# Altium PCB radxa_cm3_io_board_v1360_pcb_layout.PcbDoc (part 2 of 7)
Units mil, origin at the board's own origin, x right, y up, seen from the top; angles counter-clockwise.
Board outline 6299.61 x 3544.09 mil, 4 copper layers (Top, GND, Power, Bottom), stack 35.4 mil thick; 513 components, 397 nets, 1855 pads, 2695 vias.
Unrouted connection lines stored in the file: 280.
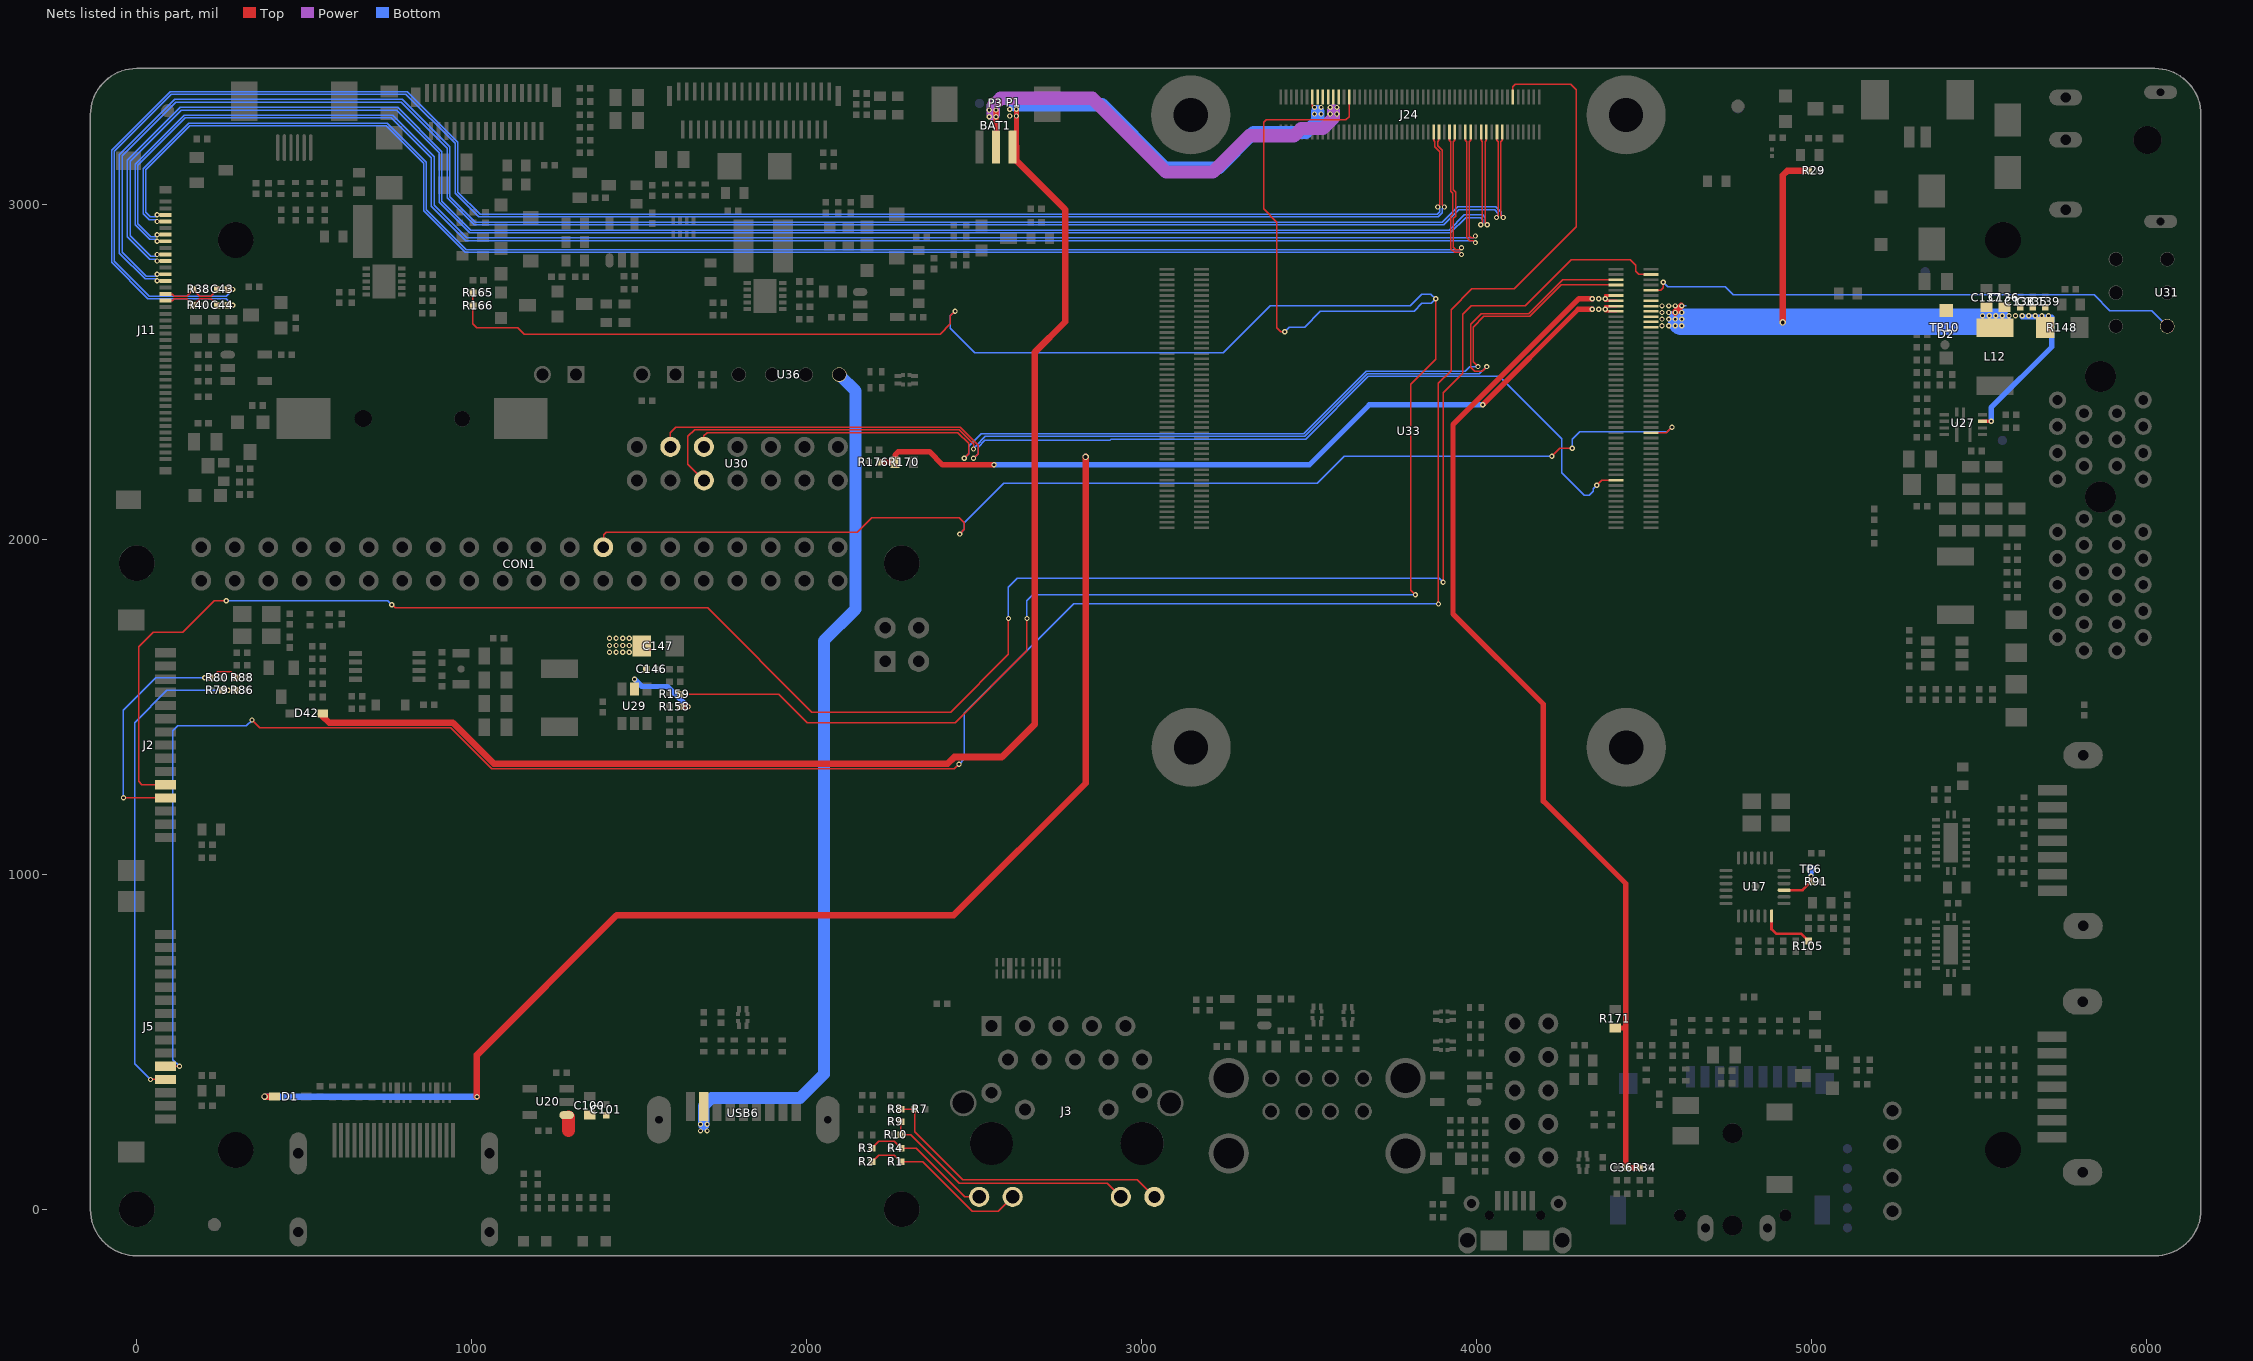
[diagram p4: the nets of this part, all layers, seen from the top]

## Footprints (in the part's own frame and the unit in brackets; to place one, negate y for a bottom-side part, rotate by r counter-clockwise, add the part's x,y. Pads: shape width x height; smd on the part's side, far side on the other; paste and mask are expansions set on the pad) (continued)
QFN24 [mm]
  oval 0.25x1 smd: 1(-1.25,-2.2) 2(-0.75,-2.2) 3(-0.25,-2.2) 4(0.25,-2.2) 5(0.75,-2.2) 6(1.25,-2.2) 13(1.25,2.2) 14(0.75,2.2) 15(0.25,2.2) 16(-0.25,2.2) 17(-0.75,2.2) 18(-1.25,2.2)
  oval 1x0.25 smd: 7(2.2,-1.25) 8(2.2,-0.75) 9(2.2,-0.25) 10(2.2,0.25) 11(2.2,0.75) 12(2.2,1.25) 19(-2.2,1.25) 20(-2.2,0.75) 21(-2.2,0.25) 22(-2.2,-0.25) 23(-2.2,-0.75) 24(-2.2,-1.25)
  rrect100% 0.6x0.6 smd: 25(-0.037,-0.041)
  Top region: -1.253,0.95 -1.242,1.028 -1.212,1.101 -1.164,1.164 -1.101,1.212 -1.028,1.242 -0.95,1.253 -0.95,1.25 0.95,1.253 1.028,1.242 1.101,1.212 1.164,1.164 1.212,1.101 1.242,1.028 1.253,0.95 1.25,0.95 1.253,-0.95 1.242,-1.028 1.212,-1.101 1.164,-1.164 1.101,-1.212 1.028,-1.242 0.95,-1.253 0.95,-1.25 -0.95,-1.253 -1.028,-1.242 -1.101,-1.212 -1.164,-1.164 -1.212,-1.101 -1.242,-1.028 -1.253,-0.95 -1.25,-0.95 -1.25,0.95
  silkscreen extent -2.03,-2.98 2.01,2
R0201 [mm]
  rect 0.3x0.3 smd: 1(-0.25,0) 2(0.25,0)
  silkscreen extent -0.5,-0.25 0.5,0.25
R0402 [mm]
  rect 0.5x0.5 smd: 1(-0.4,0) 2(0.4,0)
  silkscreen extent -0.8,-0.4 0.8,0.4
R0603 [mm]
  rect 0.7x0.9 smd: 1(-0.7,0) 2(0.7,0)
  silkscreen extent -1.2,-0.6 1.2,0.6
R0805 [mm]
  rect 0.9x1.3 smd: 1(-0.85,0) 2(0.85,0)
  silkscreen extent -1.5,-0.8 1.5,0.8
R1206 [mm]
  rect 1.4x1.6 smd mask+0.05: 1(-1.3,0) 2(1.3,0)
  silkscreen extent -2.2,-1 2.2,1
RJ45_HRK1 [mm]
  rect 1.524x1.524 hole 0.9 mask+0.05: 1(0,0)
  round 1.524 / inner round 1.1 / far side round 1.524 hole 0.9 mask+0.05: 2(1.27,-2.54) 3(2.54,0) 4(3.81,-2.54) 5(5.08,0) 6(6.35,-2.54) 7(7.62,0) 8(8.89,-2.54) 9(10.16,0) 10(11.43,-2.54) 11(0,-5.06) 12(2.54,-6.33) 13(8.89,-6.33) 14(11.43,-5.06) 18(12.36,-12.95)
  round 1.524 hole 1.02 mask+0.05: 15(-0.92,-12.95) 16(1.62,-12.95) 17(9.82,-12.95)
  round 2 / inner round 2.2 / far side round 2.2 hole 1.6 mask+0.15: 19(-2.13,-5.84) 20(13.57,-5.84)
  round 3.25 hole 3.25: 21(0.005,-8.89) 22(11.435,-8.89)
  silkscreen extent -2.33,-19.64 13.77,1.71
RN8P4RC [mil]
  rect 11x21 smd: 1(30,-20.5) 2(10,-20.5) 3(-10,-20.5) 4(-30,-20.5) 5(-30,20.5) 6(-10,20.5) 7(10,20.5) 8(30,20.5)
  silkscreen extent -44,-54 44,21
RP2_0405 [mm]
  rect 0.5x0.3 smd: 1(-0.625,-0.275) 2(0.625,-0.275) 3(-0.625,0.275) 4(0.625,0.275)
  silkscreen extent -1,-0.6 1.03,0.6
S0T-23 [mil]
  rect 36x36 smd: 1(-37.5,-39) 2(37.5,-39)
  rect 36x50 smd: 3(0,41)
  silkscreen extent -55,-50 55,40
SMD-3P-1.25 [mm]
  rect 0.6x2.5 smd: 1(-1.25,0) 2(0,0) 3(1.25,0)
  rect 2x2.7 smd: 4(3.9,-3.25) 5(-3.9,-3.25)
  silkscreen extent -4.41,-5.51 4.4,-0.48
SMD_1D25X2PIN_90 [mm]
  rect 0.8x1.6 smd: 1(-1.25,0) 2(0,0)
  rect 2.1x3 smd: 3(-3.85,2.82) 4(2.6,2.82)
  silkscreen extent -5,-0.9 3.72,4.47
SMD_SATA_7P_50_180 [mm]
  rect 0.8x2.2 smd: 1(0,0) 2(1.27,0) 3(2.54,0) 4(3.81,0) 5(5.08,0) 6(6.35,0) 7(7.62,0)
  oval 2x3 hole 0.8 slot 1.7 at 90 deg: 8(10.28,2.3) 9(-2.66,2.3)
  silkscreen extent -4.19,-0.57 11.81,11.16
SOD323 [mm]
  rect 0.63x0.83 smd: 1(-1.115,0) 2(1.115,0)
  silkscreen extent -1.6,-0.7 1.84,0.7
SOD_123 [mm]
  rect 1x1 smd: 1(-1.8,0) 2(1.8,0)
  silkscreen extent -1.11,-0.9 1.13,0.9
SOD_323 [mm]
  rect 0.8x0.6 smd mask+0.05: 1(-1.2,0) 2(1.2,0)
  silkscreen extent -0.67,-0.65 0.64,0.65
SON10_2R50X1R00X0R50 [mm]
  rect 0.2x0.675 smd: 1(-1,-0.437) 2(-0.5,-0.437) 4(0.5,-0.437) 5(1,-0.437) 6(1,0.437) 7(0.5,0.437) 9(-0.5,0.437) 10(-1,0.437)
  rect 0.4x0.775 smd: 3(0,-0.388) 8(0,0.388)
  silkscreen extent -1.46,-1.39 1.25,0.5
SOT23 [mil]
  rect 39x39 smd: 1(-38,-44.53) 2(38,-44.53)
  rect 39.37x47.24 smd: 3(0,44.53)
  silkscreen extent -59,-19 59,23
SOT25 [mm]
  oval 0.6x1.1 smd: 1(-0.95,-1.4)
  rect 0.6x1.1 smd: 2(0,-1.4) 3(0.95,-1.4) 4(0.95,1.4) 5(-0.95,1.4)
  silkscreen extent -1.5,-0.52 1.5,0.55
SOT_23 [mm]
  rect 0.8x1.1 smd: 1(-0.95,-1.1) 2(0.95,-1.1) 3(0,1.1)
  silkscreen extent -1.6,-0.9 1.6,0.9
SOT_23_5 [mm]
  oval 1.1x0.6 smd: 1(-1.4,1)
  rect 1.1x0.6 smd: 2(-1.4,0) 3(-1.4,-1) 4(1.4,-1) 5(1.4,1)
  silkscreen extent -0.52,-1.5 0.55,1.5
SOT_23_6 [mm]
  rect 0.7x1 smd mask+0.05: 1(-0.95,-1.3) 2(0,-1.3) 3(0.95,-1.3) 4(0.95,1.3) 5(0,1.3) 6(-0.95,1.3)
  silkscreen extent -1.82,-1.72 1.75,0.7
TF-CKT01-009D [mm]
  rect 1.6x0.7 smd: 1(-10.516,3.2) 2(-10.516,2.1) 3(-10.516,1) 4(-10.516,-0.1) 5(-10.516,-1.2) 6(-10.516,-2.3) 7(-10.516,-3.4) 8(-10.516,-4.5) 9(-10.516,-5.6)
  rect 1.6x1.4 smd: 10(-10.016,-7) 13(-10.016,7.9)
  rect 2.2x1.2 smd: 11(-0.416,-6.8) 12(-0.416,8.7)
  round 0.9 hole 0.9 unplated: 14(0,4) 15(0,-4)
  silkscreen extent -10.52,-6.4 3.98,8.3
TP_0R70 [mm]
  round 0.7 smd: 1(0,0)
  silkscreen extent -0.45,-0.45 0.45,0.45
USB30-L1 [mm]
  rect 0.7x2.2 smd: 1(-3,0) 2(-1,0) 3(1,0) 4(3,0) 5(4,0) 6(2,0) 7(0,0) 8(-2,0) 9(-4,0)
  oval 1.8x3.6 / inner oval 0.7x2.6 / far side oval 1.8x3.6 hole 0.584 slot 2.489 at 90 deg: 10(-6.4,-1) 11(6.4,-1)
  silkscreen extent -9.28,-14.64 9.29,0.92
USB_DUAL [mm]
  round 1.3 / inner round 0.9 / far side round 1.3 hole 0.9: 1(3.18,3.5) 2(3.18,1) 3(3.18,-1) 4(3.18,-3.5) 5(5.68,3.5) 6(5.68,1) 7(5.68,-1) 8(5.68,-3.5)
  round 3.048 / inner round 2.5 / far side round 3.048 hole 2.3: 9(0,6.7)
  round 3.048 / inner round 2.5 / far side round 3.048 hole 2.286: 10(0,-6.7) 11(5.7,6.7) 12(5.7,-6.7)
  silkscreen extent -9.97,-7.52 7.1,7.61
XIAO_4PIN_2D54 [mm]
  round 1.4 hole 0.9: 1(0.01,0) 2(2.55,0) 3(5.09,0) 4(7.63,0)
  silkscreen extent -1.19,-3.3 8.81,2.36

## Via types
v1: diameter 15.75, hole 7.87, Top to Bottom, 2660 vias
v2: diameter 19.68, hole 11.81, Top to Bottom, 35 vias

## Nets (pads, with @x,y where several pads share a name; then routed paths per layer and width w, separated by ;. In a path a pad name is that pad's centre, name@x,y a point inside that pad or via, vN(x,y) a via of type N, cw(c..) or ccw(c..) an arc to the next point about the centre after c; other vN are vias at no path point)
3V3_PWR_EN: J24.74 R159.1 R165.2 R166.1 | length 8067.4
  Top w3.94: R165.2@1003.94,2736.22 R166.1@1003.94,2696.85 1003.94,2643.7 1015.75,2631.89 1137.8,2631.89 1157.48,2612.2 2398.31,2612.2 2429.13,2643.03 2429.13,2667.32 v1(2442.91,2681.1) ; R159.1@1622.05,1537.4 1917.32,1537.4 2001.97,1452.76 2442.91,1452.76 2657.48,1667.32 v1(2657.48,1763.78) ; v1(3427.17,2620.08) 3415.35,2620.08 3403.54,2631.89 3403.54,2946.85 3364.17,2986.22 3364.17,3244.68 3371.46,3251.97 3609.65,3251.97 3619.49,3261.81 J24.74@3619.49,3320.08 ; v1(3816.93,1834.65) 3803.15,1848.43 3803.15,2462.6 3877.95,2537.4 v1(3877.95,2718.5)
  Bottom w3.94: v1(2442.91,2681.1) 2429.13,2667.32 2429.13,2629.92 2501.97,2557.09 3244.09,2557.09 3383.86,2696.85 3801.18,2696.85 3836.61,2732.28 3863.35,2732.28 v1@3877.54,2718.09 ; v1(2657.48,1763.78) 2657.48,1816.99 2675.14,1834.65 v1(3816.93,1834.65) ; v1(3427.17,2620.08) 3440.94,2633.86 3486.22,2633.86 3533.46,2681.1 3812.99,2681.1 3836.61,2704.72 3864.17,2704.72 v1@3877.54,2718.09 ; v1(3877.95,2718.5) v1@3877.54,2718.09
4G_DISABLE: CON1.26 U33.37 | length 3537
  Top w3.94: CON1.26@1392.91,1976.38 1393.7,1976.38 1393.7,2013.78 1401.57,2021.65 2151.57,2021.65 2194.88,2064.96 2454.72,2064.96 2470.47,2049.21 2470.47,2029.53 v1(2456.69,2015.75) ; v1(4224.41,2248.03) 4248.03,2271.65 v1(4285.43,2271.65) ; U33.37@4520.47,2318.31 4566.34,2318.31 v1(4582.68,2334.65)
  Bottom w3.94: v1(2456.69,2015.75) 2470.47,2029.53 2470.47,2049.89 2587.91,2167.32 3523.62,2167.32 3604.33,2248.03 v1(4224.41,2248.03) ; v1(4285.43,2271.65) 4285.43,2299.21 4307.09,2320.87 4568.9,2320.87 v1(4582.68,2334.65)
5V0_USB30: C100.1 C101.1 U20.1 U36.1 USB6.1 | length 2649.1
  Top w39.37: 1289.37,236.22 U20.1@1289.37,275.59
  Bottom w3.94: v1(1683.07,253.94) 1692.91,253.94
  Bottom w35.43: 1692.91,253.94 1692.91,309.06 1716.54,332.68 1980.31,332.68 2051.18,403.54 2051.18,1696.85 2145.67,1791.34 2145.67,2443.31 U36.1@2097.24,2491.73
  other v1: 1683.07,234.25 1702.76,234.25 1702.76,253.94
100M_LED_G+: J3.15 R3.2 R4.1 | length 396.7
  Top w3.94: R3.2@2194.88,183.07 2214.57,202.76 2261.81,202.76 R4.1@2281.5,183.07 2326.77,183.07 2472.44,37.4 J3.15@2514.96,37.4
100M_LED_G-: J3.16 R1.2 R2.1 | length 515.5
  Top w3.94: R2.1@2194.88,141.73 2214.57,161.42 2261.81,161.42 R1.2@2281.5,141.73 2346.46,141.73 2494.09,-5.91 2571.65,-5.91 J3.16@2614.96,37.4
1000M_LED_Y+: J3.17 R9.2 R10.1 | length 772.3
  Top w3.94: R9.2@2281.5,261.81 R10.1@2281.5,222.44 2311.02,222.44 2454.72,78.74 2896.46,78.74 J3.17@2937.8,37.4
1000M_LED_Y-: J3.18 R7.2 R8.1 | length 904
  Top w3.94: R8.1@2281.5,299.21 R7.2@2322.83,299.21 2323.23,298.82 2323.23,231.89 2466.54,88.58 2986.61,88.58 J3.18@3037.8,37.4
+1V8: C36.1 R34.2 R171.2 U33.88 U33.90 | length 3159.5
  Top w3.94: 4438.98,596.46 4444.22,596.46 4444.88,597.11
  Top w7.87: U33.88@4415.75,2712.01 4383.86,2712.01 v1(4383.86,2718.5) 4383.86,2727.76 U33.90@4415.75,2727.76
  Top w15.75: v1(4344.49,2718.5) 4305.12,2718.5 3929.13,2342.52 3929.13,1777.56 4198.82,1507.87 4198.82,1218.5 4444.88,972.44 4444.88,597.11 4444.88,541.34 ; R171.2@4413.39,541.34 4444.88,541.34 ; R34.2@4486.22,124.02 C36.1@4448.82,124.02 4444.88,127.95 4444.88,541.34
  other v1: 4364.17,2718.5
+3V3: R170.2 R176.2 U33.84 U33.86 | length 2441.9
  Top w7.87: U33.84@4415.75,2680.51 4383.86,2680.51 v1(4383.86,2687.01) 4383.86,2696.26 U33.86@4415.75,2696.26
  Top w15.75: R176.2@2216.54,2230.31 R170.2@2263.78,2230.31 2263.78,2251.97 2273.62,2261.81 2366.14,2261.81 2405.51,2222.44 v1(2559.06,2222.44) ; v1(4017.72,2401.57) 4303.15,2687.01 v1(4344.49,2687.01)
  Bottom w15.75: v1(2559.06,2222.44) 3500,2222.44 3679.13,2401.57 v1(4017.72,2401.57)
  other v1: 4364.17,2687.01
+5V_INPUT: C135.1 C136.1 C137.1 C138.1 C139.1 C146.1 C147.1 D1.1 D2.2 L12.2 R29.1 R148.2 R158.1 TP10.1 U27.5 U29.5 U33.77 U33.79 U33.81 U33.83 U33.85 U33.87 | length 7138.1
  Top w3.94: L12.2@5547.24,2631.89 5549.21,2631.89 v1(5549.21,2667.32)
  Top w9.84: U27.5@5509.85,2352.36 5527.56,2352.36 v1(5535.43,2352.36)
  Top w15.75: R158.1@1622.05,1500 v1(1645.67,1500)
  Top w19.68: v2(381.89,336.61) D1.1@411.42,336.61 ; v1(1015.75,336.61) 1015.75,460.99 1432.71,877.95 2438.42,877.95 2832.68,1272.21 v2(2832.68,2246.06) ; v1(4592.52,2677.17) 4595.47,2680.12 4595.47,2682.09 v1@4610.24,2696.85 ; v2(4913.39,2647.64) 4913.39,3086.61 4927.17,3100.39 R29.1@4990.16,3100.39
  Bottom w3.94: v1(4592.52,2696.85) 4625.98,2696.85 ; TP10.1@5397.64,2631.89 5399.61,2633.86 5399.61,2649.61 ; 5557.09,2649.61 v1(5568.9,2667.32)
  Bottom w7.87: v1(4572.83,2677.17) 4582.68,2677.17 4610.24,2649.61
  Bottom w15.75: v1(1486.22,1582.68) 1507.87,1561.02 1584.65,1561.02 v1(1645.67,1500) ; v1(5535.43,2352.36) 5535.43,2393.7 5716.54,2574.8 5716.54,2663.39 ; v1(5627.95,2667.32) 5627.95,2663.39 5716.54,2663.39 ; 5716.54,2612.2 5716.54,2663.39
  Bottom w19.68: v2(381.89,336.61) v1(1015.75,336.61) ; v2(4913.39,2647.64) 4917.32,2647.64 v2@4919.29,2649.61
  Bottom w78.74: 5557.09,2649.61 5399.61,2649.61 ; 5399.61,2649.61 4919.29,2649.61 4610.24,2649.61 5399.61,2649.61
  other v1: 1411.42,1663.39 1431.1,1663.39 1450.79,1663.39 1470.47,1663.39 1411.42,1683.07 1431.1,1683.07 1450.79,1683.07 1470.47,1683.07 1411.42,1704.72 1431.1,1704.72 1450.79,1704.72 1470.47,1704.72 4553.15,2637.8 4572.83,2637.8 4592.52,2637.8 4612.2,2637.8 4553.15,2657.48 4572.83,2657.48 4592.52,2657.48 4612.2,2657.48 5509.84,2667.32 5529.53,2667.32 5588.58,2667.32 5608.27,2667.32 5647.64,2667.32 5667.32,2667.32 5687.01,2667.32 5706.69,2667.32 4553.15,2677.17 4612.2,2677.17 4553.15,2696.85 4572.83,2696.85 4612.2,2696.85
AIN0: U30.5 U33.96 | length 3353.7
  Top w3.94: U30.5@1693.31,2175.98 1645.67,2223.62 1645.67,2307.09 1665.35,2326.77 2454.78,2326.77 2498.03,2283.52 v1(2498.03,2269.68) ; v1(4029.53,2515.75) 4015.75,2501.97 3994.09,2501.97 3982.28,2513.78 3982.28,2641.73 4013.78,2673.23 4154.89,2673.23 4256.67,2775 U33.96@4415.75,2775
  Bottom w3.94: v1(2498.03,2269.68) 2496.98,2270.74 2503.94,2277.7 2503.94,2278.65 2532.37,2307.09 3486.32,2307.09 3673.33,2494.09 4007.87,2494.09 v1(4029.53,2515.75)
AIN1: U30.6 U33.94 | length 3152.2
  Top w3.94: U30.6@1693.31,2275.98 1693.31,2309.06 1703.15,2318.9 2451.52,2318.9 2484.25,2286.17 2484.25,2255.91 v1(2470.47,2242.13) ; v1(4003.94,2515.75) 3990.16,2529.53 3990.16,2531.5 3990.16,2633.86 4021.65,2665.35 4158.16,2665.35 4252.05,2759.25 U33.94@4415.75,2759.25
  Bottom w3.94: v1(2470.47,2242.13) 2484.25,2255.91 2484.25,2277.56 2521.65,2314.96 3483.02,2314.96 3670.02,2501.97 3965.45,2501.97 3979.23,2515.75 v1(4003.94,2515.75)
BAT_3V7_LOSE: BAT1.2 J24.78 J24.80 J24.82 P3.1 | length 1392.7
  Top w3.94: J24.80@3572.24,3320.08 J24.80@3572.83,3319.49
  Top w15.75: BAT1.2@2564.96,3171.26 v1(2564.96,3281.5)
  Power w3.94: v1(3562.99,3289.37) 3572.83,3279.53
  Power w7.87: v1(2545.28,3261.81) 2547.24,3261.81 2549.21,3259.84 2557.09,3267.72
  Power w39.37: 2557.09,3267.72 2557.09,3295.28 2578.74,3316.93 2852.36,3316.93 3072.83,3096.46 3212.6,3096.46 3320.87,3204.72 3454.72,3204.72 3476.38,3226.38 3541.34,3226.38 3572.83,3257.87 3572.83,3279.53
  Bottom w15.75: v1(2564.96,3281.5) P3.1@2564.96,3301.18
  other v1: 2564.96,3261.81 3562.99,3269.68 3582.68,3269.68 2545.28,3281.5 3582.68,3289.37
BAT_3V7_PLUS: BAT1.1 D42.1 J24.84 J24.86 J24.88 P1.1 | length 5314
  Top w3.94: J24.88@3509.25,3320.08 3509.25,3289.37 v1(3515.75,3289.37)
  Top w15.75: 2625.98,3173.23 v1(2625.98,3283.46)
  Top w19.68: D42.1@555.12,1480.31 555.12,1472.44 574.8,1452.76 943.95,1452.76 1066,1330.71 2421.26,1330.71 2440.94,1350.39 2582.68,1350.39 2681.1,1448.82 2681.1,2559.06 2771.65,2649.61 2771.65,2984.25 2625.98,3129.92 2625.98,3173.23
  Bottom w7.87: P1.1@2620.08,3297.24 2620.08,3283.46 v1(2625.98,3283.46) ; v1(3515.75,3269.68) 3517.72,3269.68 3525.59,3277.56
  Bottom w39.37: P1.1@2620.08,3297.24 2881.89,3297.24 3070.87,3108.27 3228.35,3108.27 3334.65,3214.57 3490.16,3214.57 3525.59,3250 3525.59,3277.56
  other v1: 2606.3,3263.78 2625.98,3263.78 3535.43,3269.68 2606.3,3283.46 3535.43,3289.37
BT_NDIS: U31.3 U33.91 | length 1614.6
  Top w3.94: U33.91@4520.47,2743.5 4549.21,2743.5 4557.09,2751.38 v1(4557.09,2767.72)
  Bottom w3.94: v1(4557.09,2767.72) 4570.87,2753.94 4741.51,2753.94 4765.13,2730.31 5842.52,2730.31 5889.76,2683.07 6014.17,2683.07 U31.3@6061.02,2636.22
BUSJ: R105.2 U17.18 | length 164.3
  Top w7.87: U17.18@4879.92,875.98 4879.92,836.61 4893.7,822.83 4968.5,822.83 R105.2@4990.16,801.18
CAM_CLKOUT0: J2.4 R80.1 R88.2 | length 781
  Top w3.94: v1(-39.37,1228.35) J2.4@86.61,1228.35 ; v1(202.76,1586.61) R80.1@224.41,1586.61 242.13,1604.33 281.5,1604.33 R88.2@299.21,1586.61
  Bottom w3.94: v1(-39.37,1228.35) -39.37,1490.16 57.09,1586.61 v1(202.76,1586.61)
CAM_CLKOUT1: J5.4 R79.1 R86.2 | length 1492.6
  Top w3.94: v1(41.34,387.8) J5.4@86.61,387.8 ; R79.1@255.91,1549.21 v1(273.62,1549.21) R86.2@299.21,1549.21
  Bottom w3.94: v1(41.34,387.8) -5.91,435.04 -5.91,1452.76 90.55,1549.21 v1(273.62,1549.21)
CAM_GPIO: J2.5 U33.97 | length 6344.8
  Top w3.94: J2.5@86.61,1267.72 15.75,1267.72 5.91,1277.56 5.91,1679.13 49.21,1722.44 137.8,1722.44 232.28,1816.93 v1(267.72,1816.93) ; v1(761.81,1805.12) 771.65,1795.28 1704.67,1795.28 2015.69,1484.25 2429.87,1484.25 2602.36,1656.75 v1(2602.36,1763.78) ; v1(3899.61,1872.05) 3899.61,2437.01 3958.66,2496.06 3958.66,2671.26 3984.25,2696.85 4145.05,2696.85 4282.85,2834.65 4458.66,2834.65 4474.41,2818.9 4474.41,2800.59 4484.25,2790.75 U33.97@4520.47,2790.75
  Bottom w3.94: v1(267.72,1816.93) 750,1816.93 v1(761.81,1805.12) ; v1(2602.36,1763.78) 2602.36,1857.21 2629.01,1883.86 3887.8,1883.86 v1(3899.61,1872.05)
CAM_PWR_2: J5.5 J24.12 | length 7195.1
  Top w3.94: J5.5@86.61,427.17 v1(127.95,427.17) ; v1(344.49,1460.63) 368.11,1437.01 937.43,1437.01 1059.47,1314.96 2440.94,1314.96 v1(2454.72,1328.74) ; v1(3885.83,1807.09) 3885.83,2466.54 3923.23,2503.94 3923.23,2685.77 3985.49,2748.03 4111.59,2748.03 4297.24,2933.69 4297.24,3341.9 4280.88,3358.27 4115.55,3358.27 4107.68,3350.39 J24.12@4107.68,3320.08
  Bottom w3.94: v1(127.95,427.17) 108.27,446.85 108.27,1429.13 122.05,1442.91 326.77,1442.91 v1(344.49,1460.63) ; v1(2454.72,1328.74) 2470.47,1344.49 2470.47,1480.73 2796.82,1807.09 v1(3885.83,1807.09)
DRV: R91.2 TP6.1 U17.21 | length 128.7
  Top w7.87: U17.21@4917.32,952.76 4972.44,952.76 R91.2@4998.03,978.35 v1(4998.03,994.09)
  Bottom w15.75: v1(4998.03,994.09) TP6.1@4998.03,1015.75
EDP_TX_AUXN: C44.2 J24.41 | length 5295.4
  Top w3.94: C44.2@271.65,2698.82 v1(287.4,2698.82) ; J24.41@3871.46,3216.14 3871.46,3190.94 3875.39,3187.01 3875.39,3171.26 3889.76,3157.48 3889.76,2998.03 v1(3883.86,2992.13)
  Bottom w3.94: v1(287.4,2698.82) 267.72,2718.5 33.46,2718.5 -74.8,2826.77 -74.8,3161.42 100.39,3336.61 807.09,3336.61 958.66,3185.04 958.66,3036.73 1024.92,2970.47 3882.57,2970.47 3889.76,2977.67 3889.76,2986.22 v1(3883.86,2992.13)
EDP_TX_AUXP: C43.1 J24.39 | length 5281.9
  Top w3.94: C43.1@271.65,2746.06 v1(287.4,2746.06) ; J24.39@3887.2,3216.14 3887.2,3190.94 3883.27,3187.01 3883.27,3174.71 3893.03,3165.35 3897.64,3160.74 3897.64,2998.03 v1(3903.54,2992.13)
  Bottom w3.94: v1(287.4,2746.06) 267.72,2726.38 37.4,2726.38 -66.93,2830.71 -66.93,3158.16 103.66,3328.74 803.83,3328.74 950.79,3181.78 950.79,3033.46 1021.65,2962.6 3885.83,2962.6 3897.64,2974.41 3897.64,2986.22 v1(3903.54,2992.13)
EDP_TX_D0N: J11.12 J24.17 | length 5159.7
  Top w3.94: v1(61.02,2791.34) J11.12@86.61,2791.34 ; v1(4059.06,2960.63) 4059.06,2961.22 4064.37,2966.54 4064.37,3187.01 4060.43,3190.94 J24.17@4060.43,3216.14
  Bottom w3.94: v1(61.02,2791.34) 55.12,2785.43 28.85,2785.43 -43.31,2857.59 -43.31,3144.38 117.43,3305.12 790.05,3305.12 927.17,3168 927.17,3019.68 1007.87,2938.98 3897.64,2938.98 3900.9,2938.98 3946.17,2984.25 4053.15,2984.25 4064.96,2972.44 4064.96,2966.54 v1(4059.06,2960.63)
EDP_TX_D0P: J11.13 J24.15 | length 5199.3
  Top w3.94: v1(61.02,2771.65) J11.13@86.61,2771.65 ; J24.15@4076.18,3216.14 4076.18,3190.94 4072.24,3187.01 4072.24,2967.13 v1(4078.74,2960.63)
  Bottom w3.94: v1(61.02,2771.65) 55.12,2777.56 25.59,2777.56 -51.18,2854.33 -51.18,3147.64 114.17,3312.99 793.31,3312.99 935.04,3171.26 935.04,3022.95 1011.14,2946.85 3897.64,2946.85 3942.91,2992.13 4056.41,2992.13 4072.83,2975.7 4072.83,2972.44 4072.83,2966.54 v1(4078.74,2960.63)
EDP_TX_D1N: J11.9 J24.23 | length 5016
  Top w3.94: v1(61.02,2850.39) J11.9@86.61,2850.39 ; v1(4011.81,2938.98) 4017.13,2944.29 4017.13,3187.01 4013.19,3190.94 J24.23@4013.19,3216.14
  Bottom w3.94: v1(61.02,2850.39) 55.12,2844.49 42.63,2844.49 -19.69,2906.8 -19.69,3128.63 133.18,3281.5 776.27,3281.5 903.54,3154.22 903.54,3005.91 994.09,2915.35 3921.26,2915.35 3966.54,2960.63 4011.81,2960.63 4017.72,2954.72 4017.72,2944.88 v1(4011.81,2938.98)
EDP_TX_D1P: J11.10 J24.21 | length 5057.2
  Top w3.94: v1(61.02,2830.71) J11.10@86.61,2830.71 ; J24.21@4028.94,3216.14 4028.94,3190.94 4025,3187.01 4025,2945.47 v1(4031.5,2938.98)
  Bottom w3.94: v1(61.02,2830.71) 55.12,2836.61 39.37,2836.61 -27.56,2903.54 -27.56,3131.89 129.92,3289.37 779.53,3289.37 911.42,3157.48 911.42,3009.17 997.36,2923.23 3917.32,2923.23 3962.6,2968.5 4017.72,2968.5 4025.59,2960.63 4025.59,2944.88 v1(4031.5,2938.98)
EDP_TX_D2N: J11.6 J24.29 | length 4913.9
  Top w3.94: v1(61.02,2909.45) J11.6@86.61,2909.45 ; J24.29@3965.94,3216.14 3965.94,3190.94 3969.88,3187.01 3969.88,2901.57 3979.72,2891.73 3990.16,2891.73 v1(3996.06,2885.83)
  Bottom w3.94: v1(61.02,2909.45) 55.12,2903.54 42.63,2903.54 3.94,2942.24 3.94,3116.82 144.99,3257.87 760.52,3257.87 879.92,3138.47 879.92,2994.09 982.28,2891.73 3990.16,2891.73 v1(3996.06,2885.83)
EDP_TX_D2P: J11.7 J24.27 | length 4926.9
  Top w3.94: v1(61.02,2889.76) J11.7@86.61,2889.76 ; J24.27@3981.69,3216.14 3981.69,3190.94 3977.76,3187.01 3977.76,2904.84 3982.99,2899.61 3990.16,2899.61 v1(3996.06,2905.51)
  Bottom w3.94: v1(61.02,2889.76) 55.12,2895.67 39.37,2895.67 -3.94,2938.98 -3.94,3120.08 141.73,3265.75 763.78,3265.75 887.8,3141.73 887.8,2997.36 985.54,2899.61 3990.16,2899.61 v1(3996.06,2905.51)
EDP_TX_D3N: J11.3 J24.35 | length 4812.7
  Top w3.94: v1(61.02,2968.5) J11.3@86.61,2968.5 ; J24.35@3918.7,3216.14 3918.7,3190.94 3922.64,3187.01 3922.64,3039.37 3929.13,3032.87 3929.13,2970.47 3922.64,2963.98 3922.64,2868.11 3934.45,2856.3 3948.82,2856.3 v1(3954.72,2850.39)
  Bottom w3.94: v1(61.02,2968.5) 55.12,2962.6 40.66,2962.6 27.56,2975.7 27.56,3103.04 158.77,3234.25 744.77,3234.25 856.3,3122.72 856.3,2980.31 980.31,2856.3 3948.82,2856.3 v1(3954.72,2850.39)
EDP_TX_D3P: J11.4 J24.33 | length 4825.7
  Top w3.94: v1(61.02,2948.82) J11.4@86.61,2948.82 ; J24.33@3934.45,3216.14 3934.45,3190.94 3930.51,3187.01 3930.51,3043.31 3937.01,3036.81 3937.01,2964.57 3930.51,2958.07 3930.51,2871.37 3937.71,2864.17 3948.82,2864.17 v1(3954.72,2870.08)
  Bottom w3.94: v1(61.02,2948.82) 55.12,2954.72 37.4,2954.72 19.69,2972.44 19.69,3106.3 155.51,3242.13 748.03,3242.13 864.17,3125.98 864.17,2983.58 983.58,2864.17 3948.82,2864.17 v1(3954.72,2870.08)
EDPTX_AUXN: C44.1 J11.16 R40.1 | length 180.5
  Top w3.94: J11.16@86.61,2712.6 106.3,2712.6 112.2,2718.5 149.61,2718.5 R40.1@169.29,2698.82 188.98,2718.5 220.47,2718.5 C44.1@240.16,2698.82
EDPTX_AUXP: C43.2 J11.15 R38.2 | length 180.5
  Top w3.94: J11.15@86.61,2732.28 106.3,2732.28 112.2,2726.38 149.61,2726.38 R38.2@169.29,2746.06 188.98,2726.38 220.47,2726.38 C43.2@240.16,2746.06
EEPROM_NWP: U30.4 U33.20 | length 3294.1
  Top w3.94: U30.4@1593.31,2275.98 1593.31,2318.9 1609.06,2334.65 2458.04,2334.65 2511.81,2280.88 2511.81,2255.91 v1(2498.03,2242.13) ; v1(4358.27,2161.42) 4373.43,2176.57 U33.20@4415.75,2176.57
  Bottom w3.94: v1(2498.03,2242.13) 2511.81,2255.91 2511.81,2275.39 2531.69,2295.28 2905.15,2295.28 2909.09,2299.21 3489.62,2299.21 3676.63,2486.22 4067.55,2486.22 4253.94,2299.83 4253.94,2198.4 4320.45,2131.89 4336.42,2131.89 4347.9,2143.37 4347.9,2151.05 v1(4358.27,2161.42)